# Altium PCB HomeLight.PcbDoc
Units mil, origin at the board's own origin, x right, y up, seen from the top; angles counter-clockwise.
Board outline 6963.33 x 4724.41 mil, 2 copper layers (Top Layer, Bottom Layer); 86 components, 101 nets, 297 pads, 63 vias.
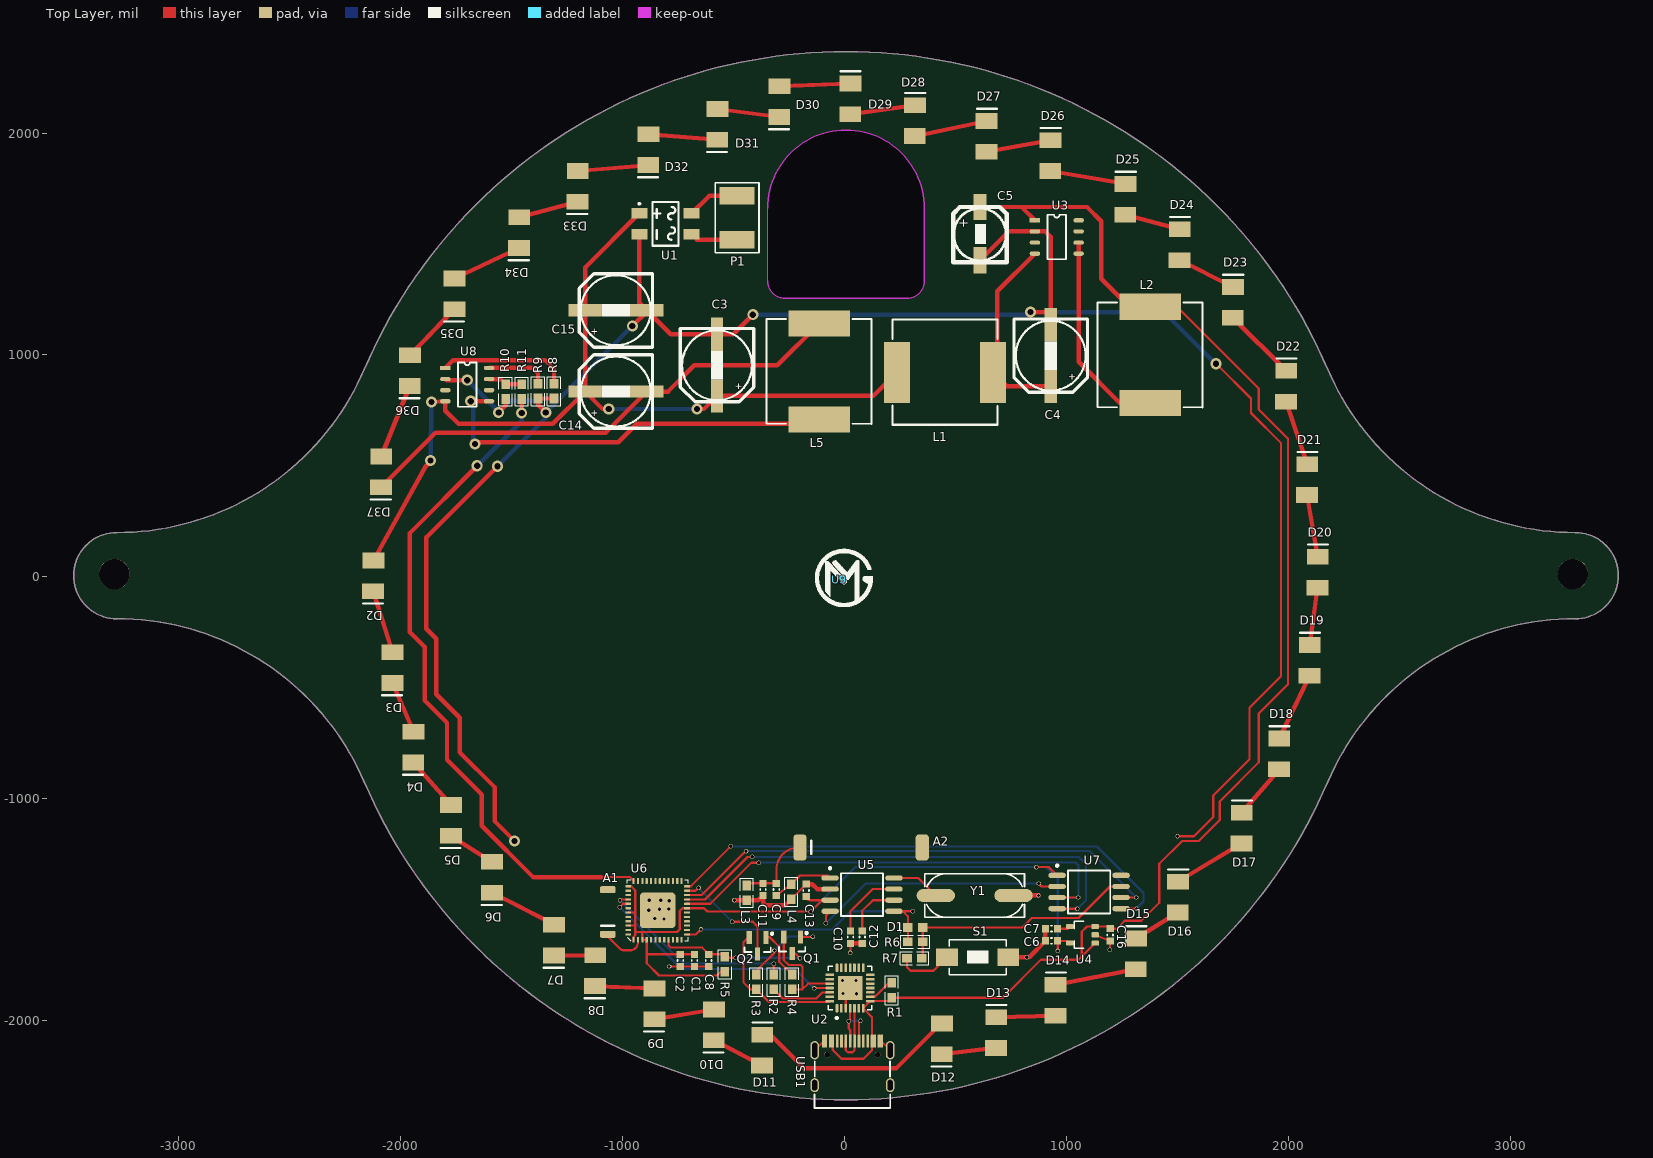
[diagram p0: Top Layer view]
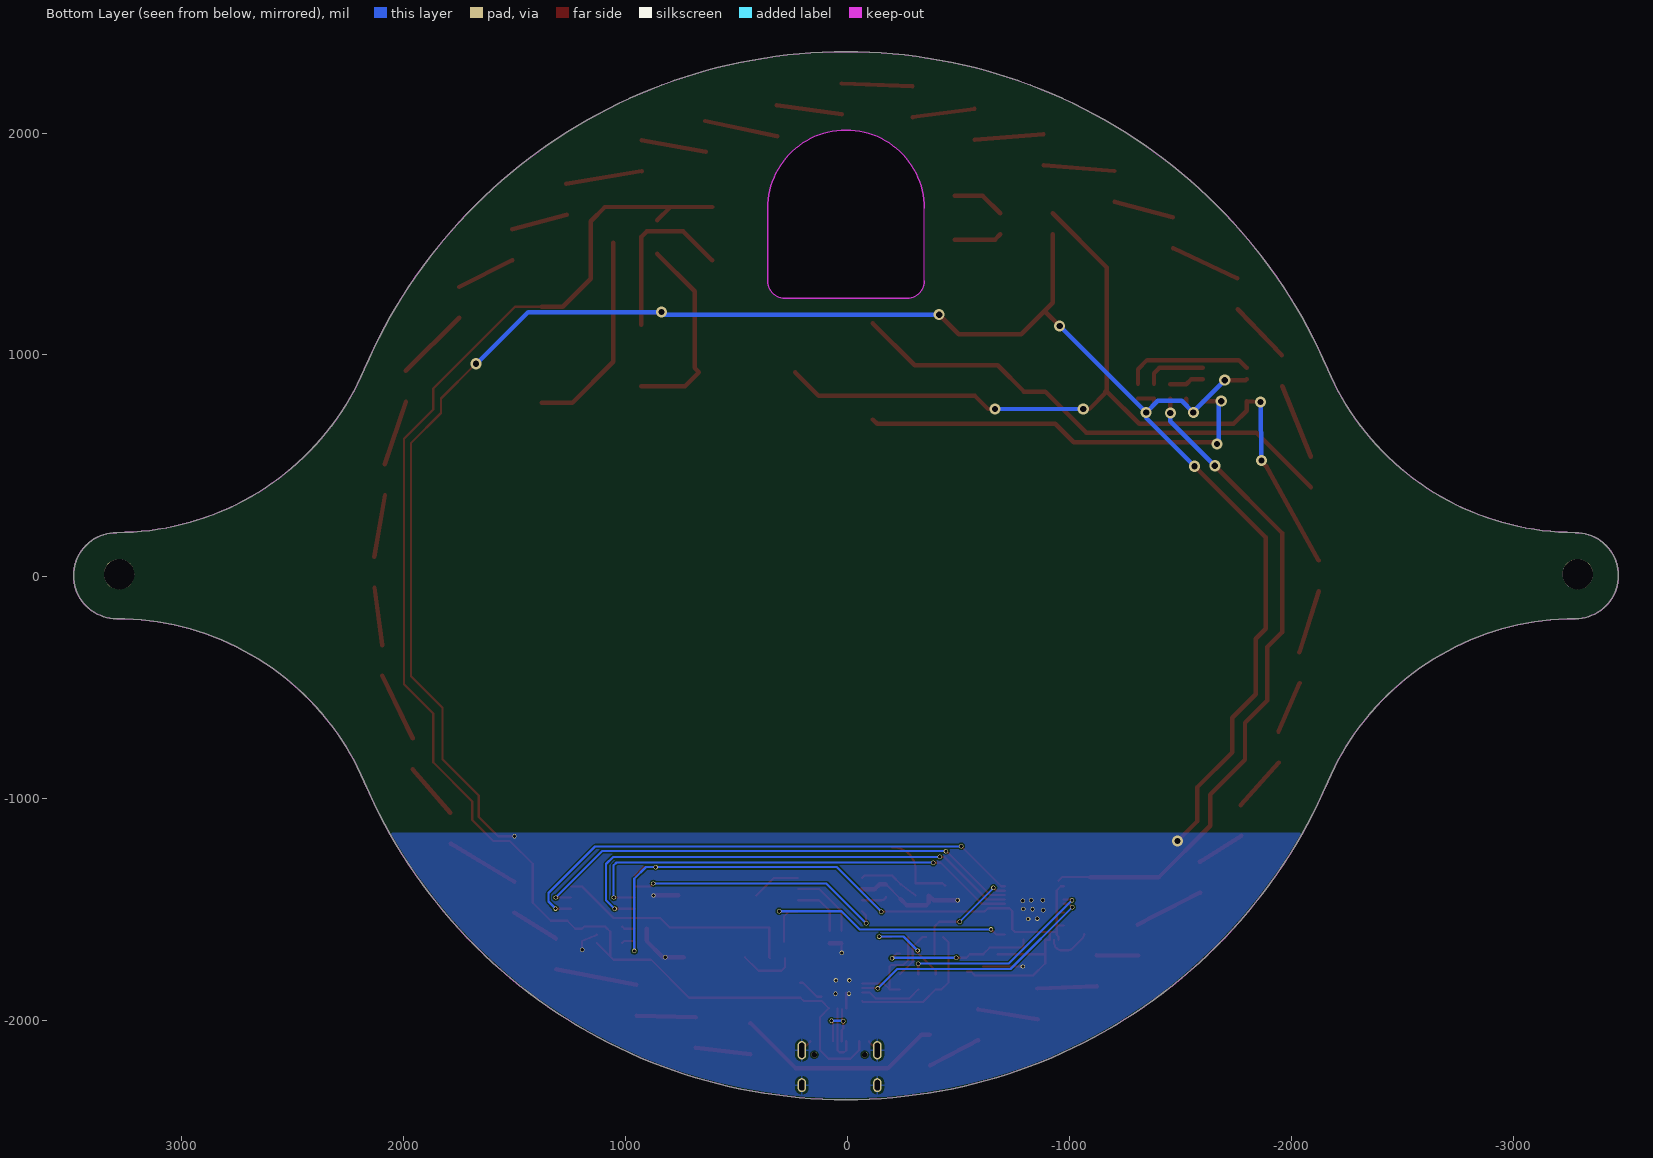
[diagram p1: Bottom Layer view, seen from below]

## Layer stack, top to bottom
Top Solder: solder mask 0.4, Solder Resist, Dk 3.5
Top Layer: signal copper 1.4
Dielectric 1: dielectric 12.6, FR-4, Dk 4.8
Bottom Layer: signal copper 1.4
Bottom Solder: solder mask 0.4, Solder Resist, Dk 3.5

## Board outline
-3280.81,-189.53 cw(c-3280.81,4.73) -3280.81,198.99 ccw(c-3280.81,1413.21) -2164.71,935.02 cw(c6.6,4.73) 2177.9,935.02 ccw(c3294,1413.21) 3294,198.99 cw(c3294,4.73) 3294,-189.53 ccw(c3294,-1403.75) 2177.9,-925.56 cw(c6.6,4.73) -2164.71,-925.56 ccw(c-3280.81,-1403.75)
cut-out: -268.01,1254.55 cw(c-268.01,1333.29) -346.75,1333.29 -346.75,1660.1 cw(c6.6,1660.1) 359.94,1660.1 359.94,1333.29 cw(c281.2,1333.29) 281.2,1254.55

## Design rules (kind name [scope] priority, off if disabled: settings)
Clearance [All] p1: gap=6
MinimumSolderMaskSliver [All] p1: minsoldermaskwidth=4
PolygonConnect [All] p1: connectstyle=Relief reliefconductorwidth=10 reliefentries=4 polygonreliefangle="90 Angle" airgapwidth=10
RoutingVias [All] p1: holewidth=15 width=20 viastyle="Through Hole" minholewidth=10 minwidth=16 maxholewidth=28 maxwidth=50
SilkToSolderMaskClearance [IsPad] p1: minsilkscreentomaskgap=0 clearancetoexposedcopper=TRUE
SolderMaskExpansion [All] p1: expansion=4
Width [All] p1: maxlimit=100 minlimit=4 preferedwidth=10
27 further rules are at their usual default settings.

## Components (designator, comment, footprint, x,y, rotation, side; value= is the part's Value field where it differs from the comment)
A1 "ANT" ANT5020R2400 -1066.93,-1511.81 r90 top
A2 "ANT" ANT15030R433 -200.79,-1220.47 r0 top
C1 "10uF" 0603-2 -676.34,-1729.47 r90 top
C2 "0.1uF" 0603-2 -740.16,-1729.47 r90 top
C3 "Cap Pol" SMD-EC-F8 -574.8,814.96 r90 top
C4 "Cap Pol" SMD-EC-F8 929.13,858.27 r90 top
C5 "Cap Pol" SMD-EC-F6 610.24,1716.54 r270 top
C6 "10uF" 0603-2 933.07,-1641.73 r0 top
C7 "10nF" 0603-2 933.07,-1586.61 r0 top
C8 "1uF" 0603-2 -612.52,-1729.47 r270 top
C9 "Cap" 0603-2 -307.09,-1409.45 r270 top
C10 "Cap" 0603-2 27,-1625 r90 top
C11 "Cap" 0603-2 -367.38,-1409.41 r270 top
C12 "Cap" 0603-2 80,-1625 r90 top
C13 "Cap" 0603-2 -173.23,-1413.39 r90 top
C14 "Cap Pol" SMD-EC-F8 -1169.29,834.65 r0 top
C15 "Cap Pol" SMD-EC-F8 -1169.29,1200.79 r0 top
C16 "Cap" 0603-2 1196.85,-1614.17 r270 top
D1 "LED0" LED_0603 319,-1581 r180 top
D2 "LED0" LED-3528 -2125.98,3.94 r270 top
D3 "LED0" LED-3528 -2039.37,-409.45 r270 top
D4 "LED0" LED-3528 -1944.88,-767.72 r270 top
D5 "LED0" LED-3528 -1775.59,-1098.43 r270 top
D6 "LED0" LED-3528 -1590.55,-1354.33 r270 top
D7 "LED0" LED-3528 -1311.02,-1637.8 r270 top
D8 "LED0" LED-3528 -1125.98,-1775.59 r270 top
D9 "LED0" LED-3528 -858.27,-1925.2 r270 top
D10 "LED0" LED-3528 -590.55,-2019.68 r270 top
D11 "LED0" LED-3528 -370.08,-2133.86 r90 top
D12 "LED0" LED-3528 437.01,-2082.68 r270 top
D13 "LED0" LED-3528 685.04,-2055.12 r90 top
D14 "LED0" LED-3528 952.76,-1909.45 r90 top
D15 "LED0" LED-3528 1314.96,-1700.79 r90 top
D16 "LED0" LED-3528 1503.94,-1444.88 r90 top
D17 "LED0" LED-3528 1791.34,-1133.86 r90 top
D18 "LED0" LED-3528 1960.63,-799.21 r90 top
D19 "LED0" LED-3528 2098.43,-377.95 r90 top
D20 "LED0" LED-3528 2133.86,19.69 r90 top
D21 "LED0" LED-3528 2086.61,437.01 r90 top
D22 "LED0" LED-3528 1992.13,858.27 r90 top
D23 "LED0" LED-3528 1751.97,1236.22 r90 top
D24 "LED0" LED-3528 1511.81,1496.06 r90 top
D25 "LED0" LED-3528 1267.72,1700.79 r90 top
D26 "LED0" LED-3528 929.13,1897.64 r90 top
D27 "LED0" LED-3528 641.73,1984.25 r90 top
D28 "LED0" LED-3528 318.9,2055.12 r90 top
D29 "LED0" LED-3528 27.56,2153.54 r90 top
D30 "LED0" LED-3528 -295.28,2141.73 r270 top
D31 "LED0" LED-3528 -574.8,2039.37 r270 top
D32 "LED0" LED-3528 -885.83,1925.2 r270 top
D33 "LED0" LED-3528 -1204.72,1759.84 r270 top
D34 "LED0" LED-3528 -1468.5,1551.18 r270 top
D35 "LED0" LED-3528 -1759.84,1275.59 r270 top
D36 "LED0" LED-3528 -1960.63,929.13 r270 top
D37 "LED0" LED-3528 -2090.55,472.44 r270 top
L1 "Inductor" L12x12 452.76,921.26 r0 top
L2 "Inductor" L12x12 1377.95,1000 r90 top
L3 "Inductor" 0603-1 -440.94,-1425.2 r90 top
L4 "Inductor" 0603-1 -240,-1420 r90 top
L5 "Inductor" L12x12 -114.17,925.2 r90 top
P1 "Header 2" HDR2X1_焊接版 -484.25,1716.54 r270 top
Q1 "S8050" SOT-23 -236.22,-1661.42 r270 top
Q2 "S8050" SOT-23 -392,-1664 r270 top
R1 "10K" 0603-1 212.6,-1864.17 r90 top
R2 "200R" 0603-1 -318.9,-1826.77 r270 top
R3 "12K" 0603-1 -397.64,-1826.77 r90 top
R4 "12K" 0603-1 -236.22,-1826.77 r90 top
R5 "10K" 0603-1 -539.37,-1747.23 r90 top
R6 "Res1" 0603-1 319.09,-1645.49 r180 top
R7 "Res1" 0603-1 315.16,-1720.29 r0 top
R8 "Res1" 0603-1 -1309.71,836.61 r90 top
R9 "Res1" 0603-1 -1381.89,836.61 r90 top
R10 "Res1" 0603-1 -1527.56,834.65 r90 top
R11 "Res1" 0603-1 -1455.38,834.65 r270 top
S1 "SW-PB" SW_PB2_A1 598,-1715 r270 top
U1 "MBXS" MBXS -925.2,1637.8 r0 top
U2 "CP2102" QFN-28 25,-1854 r90 top
U3 "BP85226" BP85226-BP2881 858.27,1606.3 r0 top
U4 "ME6211C33" SOT23-5 1070.87,-1614.17 r180 top
U5 "RF211A" SOIC-8 78.74,-1433.07 r0 top
U6 "ESP32_SIP" QFN-48_7X7 -842.52,-1503.94 r90 top
U7 "RF211A_MCU01" SOIC-8 1102.36,-1421.26 r0 top
U8 "BP2881X" BP85226-BP2881 -1799.21,940.94 r0 top
U9 "logo_MXJ" logo_MXJ -23,-14 r0 top
USB1 "Type-C" Type-C-TOP 35.43,-2192.91 r270 top
Y1 "XTAL" X-SM49 586.61,-1437.01 r180 top

## Footprints (in the part's own frame and the unit in brackets; to place one, negate y for a bottom-side part, rotate by r counter-clockwise, add the part's x,y. Pads: shape width x height; smd on the part's side, far side on the other; paste and mask are expansions set on the pad)
0603-1 [mm] "贴片带丝印"
  rect 1.1x1 smd: 1(-0.85,0) 2(0.85,0)
  silkscreen extent -1.65,-0.76 1.65,0.76, body extent -1.14,-0.38 1.14,0.38, height 1
0603-2 [mm] "贴片无丝印"
  rect 0.8x0.85 smd: 1(-0.7,0) 2(0.7,0)
  silkscreen extent -0.07,-0.33 0.07,0.33, body extent -0.87,-0.47 0.87,0.47, height 0.85
ANT5020R2400 [mm] "5x2mm,2.4G陶瓷天线"
  rrect50% 0.8x1.8 smd: 1(-2.54,0) ""(2.563,0)
  silkscreen extent -1.57,-0.76 -1.57,0.79, body extent -2.57,-0.91 2.54,0.94, height 1.32
ANT15030R433 [mm] "15x3mm,433M陶瓷天线"
  rrect50% 1.5x3 smd: 1(0,0) ""(14,0)
  silkscreen extent 1.3,-0.75 1.3,0.8
BP85226-BP2881 [mm]
  rect 1.2x0.5 smd: 1(0,0)
  oval 1.2x0.5 smd: 2(0,-1.27) 3(0,-2.54) 4(0,-3.81) 5(5,-3.81) 6(5,-2.54) 7(5,-1.27) 8(5,0)
  silkscreen extent 1.43,-4.44 3.57,0.64
HDR2X1_焊接版 [mm] "用于焊接裸露导线"
  rect 2x4 smd: 1(0,0) 2(5,0)
  silkscreen extent -1.5,-2.5 6.5,2.5
L12x12 [mm]
  rect 3x7 smd: 1(-5.5,0) 2(5.5,0)
  silkscreen extent -6,-6 6,6.04
LED-3528 [mm] "贴片二极管"
  rect 1.8x2.5 smd: 1(-1.753,0.052) 2(1.772,0.027)
  silkscreen extent 3.17,-1.14 3.18,1.14
LED_0603 [mm] "带丝印层"
  rect 1.1x1 smd: 1(-0.85,0) 2(0.85,0)
  silkscreen extent 1.65,-0.56 1.65,0.53, body extent -1.14,-0.38 1.14,0.38, height 1
logo_MXJ [mil] "直径16mm"
  silkscreen extent -109,-120 151,139
MBXS [mm] "整流桥MB1S-MB10S"
  rect 1.84x1.2 smd: 1(0,0) 2(0,-2.4) 3(6,-2.4) 4(6,0)
  silkscreen extent -0.1,-3.7 4.5,1.3
QFN-28 [mil]
  rrect50% 38x12 smd mask+5: 1(-91.5,59.06) 2(-91.5,39.37) 3(-91.5,19.68) 4(-91.5,0) 5(-91.5,-19.69) 6(-91.5,-39.37) 7(-91.5,-59.06) 15(91.5,-59.06) 16(91.5,-39.37) 17(91.5,-19.69) 18(91.5,0) 19(91.5,19.68) 20(91.5,39.37) 21(91.5,59.06)
  rrect50% 12x38 smd mask+5: 8(-59.06,-91.5) 9(-39.37,-91.5) 10(-19.68,-91.5) 11(0,-91.5) 12(19.68,-91.5) 13(39.37,-91.5) 14(59.06,-91.5) 22(59.06,91.5) 23(39.37,91.5) 24(19.68,91.5) 25(0,91.5) 26(-19.68,91.5) 27(-39.37,91.5) 28(-59.06,91.5)
  rect 106.3x110.24 smd: 29(0,0)
  silkscreen extent -140,-98 98,98, body extent -98,-98 98,98, height 35
QFN-48_7X7 [mm]
  rrect20% 4.064x4.064 smd: 0(0,0)
  rrect50% 0.675x0.25 smd: 1(-3.363,2.75) 2(-3.363,2.25) 3(-3.363,1.75) 4(-3.363,1.25) 5(-3.363,0.75) 6(-3.363,0.25) 7(-3.363,-0.25) 8(-3.363,-0.75) 9(-3.363,-1.25) 10(-3.363,-1.75) 11(-3.363,-2.25) 12(-3.363,-2.75) 25(3.363,-2.75) 26(3.363,-2.25) 27(3.363,-1.75) 28(3.363,-1.25) 29(3.363,-0.75) 30(3.363,-0.25) 31(3.363,0.25) 32(3.363,0.75) 33(3.363,1.25) 34(3.363,1.75) 35(3.363,2.25) 36(3.363,2.75)
  rrect50% 0.25x0.675 smd: 13(-2.75,-3.363) 14(-2.25,-3.363) 15(-1.75,-3.363) 16(-1.25,-3.363) 17(-0.75,-3.363) 18(-0.25,-3.363) 19(0.25,-3.363) 20(0.75,-3.363) 21(1.25,-3.363) 22(1.75,-3.363) 23(2.25,-3.363) 24(2.75,-3.363) 37(2.75,3.363) 38(2.25,3.363) 39(1.75,3.363) 40(1.25,3.363) 41(0.75,3.363) 42(0.25,3.363) 43(-0.25,3.363) 44(-0.75,3.363) 45(-1.25,3.363) 46(-1.75,3.363) 47(-2.25,3.363) 48(-2.75,3.363)
  silkscreen extent -3.5,-3.5 3.5,3.5, body extent -3.5,-3.5 3.5,3.5, height 1
SMD-EC-F6 [mm] "直径6.3的贴片电解电容"
  rect 3x1.5 smd: 1(1.27,0) 2(7.366,0)
  silkscreen extent 1.27,-3.05 7.62,3.05
SMD-EC-F8 [mm]
  rect 3.8x1.4 smd: 1(0,0) 2(7.051,0)
  silkscreen extent -0.69,-4.22 7.71,4.2
SOIC-8 [mm]
  oval 2x0.6 smd: 1(-3.658,1.905) 2(-3.658,0.635) 3(-3.658,-0.635) 4(-3.658,-1.905) 5(3.658,-1.905) 6(3.658,-0.635) 7(3.658,0.635) 8(3.658,1.905)
  silkscreen extent -3.78,-2.45 2.41,3.15
SOT23-5 [mm] "SOT23, 3-Leads, Body 3.1x3.0mm (max), Pitch 0.95mm, IPC Medium Density"
  rrect50% 0.889x0.6 smd: 1(-1.5,0.95) 2(-1.5,0) 3(-1.5,-0.95) 4(1.396,-0.95) 5(1.396,0.95)
  silkscreen extent -0.2,-1.55 0.9,1.55, body extent -1.48,-1.45 1.32,1.45, height 1.2
SOT-23 [mm]
  rect 1.5x0.6 smd: 1(-0.95,0.95) 2(-0.95,-0.95) 3(0.95,0)
  silkscreen extent -1.52,-1.5 0.7,1.78, body extent -1.16,-1.45 1.21,1.45, height 1
SW_PB2_A1 [mm] "实验室常用复位开关，白色"
  rect 2x2.5 smd: 1(0,3.556) 2(0,-3.444)
  silkscreen extent -2,-3.19 2,3.31, body extent -2.03,-3.18 2.03,3.3, height 1.2
Type-C-TOP [mm]
  round 0.65 hole 0.65: 0(-0.98,2.89) 0(-0.98,-2.89)
  oval 1.6x1 hole 0.6 slot 1.2 at 0 deg: 1(2.52,4.325) 2(2.52,-4.325)
  oval 2.1x1 hole 0.6 slot 1.7 at 0 deg: 3(-1.48,-4.325) 4(-1.48,4.325)
  rrect50% 1.5x0.3 smd: A1(-2.52,-3.35) A4(-2.52,-2.55) A5(-2.52,-1.25) A6(-2.52,-0.25) A7(-2.52,0.25) A8(-2.52,1.25) A9(-2.52,2.55) A12(-2.52,3.35) B1(-2.52,3.05) B4(-2.52,2.25) B5(-2.52,1.75) B6(-2.52,0.75) B7(-2.52,-0.75) B8(-2.52,-1.75) B9(-2.52,-2.25) B12(-2.52,-3.05)
  silkscreen extent -0.22,-4.33 5.12,4.33, body extent -2.57,-4.48 5.18,4.48, height 3.26
X-SM49 [mm] "贴片晶振"
  oval 4.4x1.5 smd: 1(4.45,0.004) 2(-4.45,-0.004)
  silkscreen extent -5.7,-2.5 5.72,2.5

## Part data
C1 C2 C6 C7 C8: library part Cap, "无极性电容"
C3 C4 C5 C14 C15: "极性电解电容"
C9 C10 C11 C12 C13 C16: "无极性电容"
D1 D2 D3 D4 D5 D6 D7 D8 D9 D10 D11 D12 D13 D14 D15 D16 D17 D18 D19 D20 D21 D22 D23 D24 D25 D26 D27 D28 D29 D30 D31 D32 D33 D34 D35 D36 D37: "发光二极管"
L1 L2 L3 L4 L5: "电感"
P1: "接插件"
Q1 Q2: library part Triode-NPN, "NPN三极管"
R1 R2 R3 R4 R5: library part Res1, "贴片电阻"
R6 R7 R8 R9 R10 R11: "贴片电阻"
S1: "微动开关"
U1: "整流桥"
U2: "USBתTTL"
U3: "开关电源驱动芯片"
U4: library part LP2992, "LDO"
U5: "315M无线接收芯片"
U6: library part ESP32-PICO
U7: "无线接收芯片的解码芯片"
U8: "PWM调光非隔离降压型LED恒流驱动芯片"
USB1: library part USB-Type-C-TOP
Y1: "晶振"

## Free pads (board coordinates)
  round 137.8 hole 137.8: 1(-3291.34,11.81) 2(3283.46,11.81)

## Via types
v1: diameter 20, hole 15, Top Layer to Bottom Layer, 46 vias
v2: diameter 50, hole 28, Top Layer to Bottom Layer, 17 vias

## Nets (pads, with @x,y where several pads share a name; then routed paths per layer and width w, separated by ;. In a path a pad name is that pad's centre, name@x,y a point inside that pad or via, vN(x,y) a via of type N, cw(c..) or ccw(c..) an arc to the next point about the centre after c; other vN are vias at no path point)
3V3: C1.2 C2.2 C6.2 C13.1 R5.1 U4.5 U5.3 U6.1 U6.3 U6.4 U6.19 U6.37 U6.43 U6.46 U7.1 | length 3927.2
  Top Layer w10: U6.46 -943.17,-1572.83 -943,-1573 ; U6.43 -943.72,-1513.78 -943,-1514.5 ; U6.37 -961.33,-1395.67 -943,-1414 -943,-1514.5 ; U6.1 -950.79,-1622.79 -943,-1615 -943,-1602 ; C1.2 C2.2 -891.65,-1701.91 -891.73,-1702 ; R5.1 -557.69,-1780.69 -575,-1798 -836,-1798 -891.73,-1742.27 -891.73,-1702 ; C13.1 ccw(c-156.1,-1440.94) -156.1,-1458.07 U5.3@-101.07,-1458.07 ; U5.3 U5.3@-101.07,-1458.07 ; v1(865,-1309) 921.1,-1309 U7.1 ; v1(961,-1687) 960.63,-1686.63 C6.2 1006.08,-1641.73 U4.5 ; -943,-1602 -943,-1573 ; -943,-1602 -914,-1602 ; -943,-1573 -943,-1514.5 ; -914,-1602 -911.42,-1604.58 U6.3 U6.4 -891.73,-1702 ; -914,-1602 -755,-1602 -743,-1590 -743,-1507 -730.09,-1494.09 U6.19 -633.09,-1494.09 -618,-1509.19 -153.81,-1509.19 v1(-153,-1510) U5.3@-101.07,-1458.07
  Bottom Layer w10: v1(-153,-1510) 48,-1309 v1(865,-1309) 908,-1309 961,-1362 v1(961,-1687)
300V: C3.1 C14.1 C15.1 D2.1 L1.1 U1.1 U8.4 | length 4026.2
  Top Layer w20: D2.1 -1885.83,500 v2(-1866.14,523.62) ; v2(-1862.2,787.4) U8.4 -1799.21,748.03 -1740.16,688.98 -1314.96,688.98 C14.1 ; C14.1@-1161.42,834.65 C14.1@-1169.29,842.52 ; v2(-1062.99,755.91) -1090.55,755.91 C14.1 ; U1.1 -1169.29,1393.7 C15.1 C14.1@-1169.29,842.52 ; v2(-665.35,755.91) -633.86,755.91 C3.1 129.92,814.96 L1.1 ; C14.1 C14.1@-1169.29,842.52
  Bottom Layer w20: v2(-1866.14,523.62) v2(-1862.2,787.4) ; v2(-1062.99,755.91) v2(-665.35,755.91)
CP_RX: U2.25 U6.41 | length 1143.5
  Top Layer w10: v1(-1013,-1490) -997.41,-1474.41 U6.41 ; v1(-137,-1856) -135,-1854 U2.25
  Bottom Layer w10: v1(-1013,-1490) -735,-1768 -225,-1768 v1(-137,-1856)
CP_TX: R2.1 U6.40 | length 899.3
  Top Layer w10: v1(-1012,-1459) -1007.72,-1454.72 U6.40 ; v1(-319,-1744) -318.9,-1744.1 R2.1
  Bottom Layer w10: v1(-1012,-1459) -727,-1744 v1(-319,-1744)
DTR: Q2.2 R3.1 U2.28 | length 642.3
  Top Layer w10: Q2.2@-431.1,-1624.02 -456,-1648.91 -456,-1828 -423.76,-1860.24 R3.1 -340.87,-1917 -70.44,-1917 U2.28
EN: C8.1 Q1.3 R5.2 U6.9 | length 686.7
  Top Layer w10: U6.9 -793.31,-1661.69 -783,-1672 -641,-1672 -612.52,-1700.48 C8.1 -551.22,-1701.91 R5.2 -535.13,-1718 v1(-491,-1718) ; Q1.3 -222.18,-1698.82 v1(-201,-1720)
  Bottom Layer w10: v1(-491,-1718) -203,-1718 v1(-201,-1720)
FLASH_CLK: U6.31
FLASH_CS: U6.25
FLASH_SD0: U6.27
FLASH_SD1: U6.33
FLASH_SD2: U6.30
FLASH_SD3: U6.32
GND: C1.1 C2.1 C3.2 C4.2 C5.2 C6.1 C7.1 C8.2 C10.1 C11.2 C12.1 C13.2 C15.2 C16.2 L3.1 L4.1 R8.1 R9.1 R10.1 S1.1 U1.2 U2.3 U2.29 U3.2 U4.2 U5.2 U6.0 U8.2 USB1.1 USB1.2 USB1.3 USB1.4 USB1.A1 USB1.A12 USB1.B1 USB1.B12 Y1.2 | length 11656.9
  Top Layer w10: v1(-790.97,-1757.03) C2.1 C1.1 C8.2 ; L4.1 -173.23,-1386.69 C13.2 ; USB1.3 -96.46,-2096.26 USB1.A1 ; U2.3 U2.29@5.32,-1873.68 ; v1(26,-1696) 27,-1695 C10.1 ; USB1.A12 167.32,-2096.26 USB1.4 ; U4.2 C16.2 1196.85,-1680.15 v1(1196,-1681) ; v1(1501,-1170) 1575,-1170 1662,-1083 1662,-986 1826,-822 1826,-590 1968,-448 1968,602 1832,738 1832,803 v2(1675,960)
  Top Layer w20: U8.2 -1794.09,885.83 v2(-1700.79,885.83) ; v2(-1564,498) -1885,177 -1885,-235 -1840,-280 -1840,-530 -1734,-636 -1734,-792 -1576,-950 -1576,-1103 v2(-1488,-1191) ; v2(-1559.06,740.16) -1527.56,771.65 R10.1 ; v2(-1346.46,740.16) -1381.89,775.59 R9.1 R8.1 ; v2(-956.69,1129.92) -891.7,1194.91 C15.2 ; U1.2 -925.2,1234.28 C15.2 ; v1(-496.34,-1458.66) L3.1 -389.07,-1458.66 C11.2 -367.38,-1468.62 -356,-1480 -266.54,-1480 L4.1 ; v2(-413.39,1181.1) -501.94,1092.55 C3.2 -783.46,1092.55 C15.2 ; C13.2 -145.17,-1385.83 -122.93,-1408.07 U5.2 ; C10.1 C12.1 ; C5.2 740,1556.3 U3.2 904.33,1556.3 929.13,1531.5 C4.2 ; S1.1 v1(821,-1715) ; Y1.2 874.16,-1436.84 v1(874.32,-1437) ; 832.24,-1715 C6.1 C7.1 ; v2(838.58,1192.91) C4.2@913.39,1192.91
  Bottom Layer w20: v2(-1700.79,885.83) -1559.06,744.09 v2(-1559.06,740.16) -1506.21,793 -1399.3,793 v2(-1346.46,740.16) ; v2(-1564,498) -1346.46,715.54 v2(-1346.46,740.16) ; v2(-956.69,1129.92) v2(-1346.46,740.16) ; v2(-413.39,1181.1) 826.77,1181.1 v2(838.58,1192.91) 1439.09,1192.91 1675,957 v2(1675,960)
  other v1: 54,-1880 -7,-1879 -9,-1820 52,-1820 -814,-1543 -856,-1541 -882,-1503 -834,-1499 -793,-1498 -790,-1460 -880,-1459 -829,-1459
GPIO0: Q2.3 U6.23 | length 512.9
  Top Layer w10: U6.23 -671.35,-1415.35 v1(-658,-1402) ; v1(-506,-1555) -414,-1555 -392,-1577 Q2.3
  Bottom Layer w10: v1@-658,-1403 v1(-658,-1402) ; v1@-652.15,-1408.85 v1(-506,-1555)
GPIO2: U6.22 U7.6 | length 2265.7
  Top Layer w10: U6.22 -644.04,-1435.04 -444,-1235 v1(-444,-1237) ; U7.6 1314.74,-1446.26 v1(1315,-1446)
  Bottom Layer w10: v1@-444,-1236 1105,-1236 v1(1315,-1446)
GPIO4: U6.24 U7.5 | length 2373
  Top Layer w10: U6.24 -693.67,-1395.67 v1(-513,-1215) ; U7.5 1315.74,-1496.26 v1(1316,-1496)
  Bottom Layer w10: v1@-513,-1216 1138,-1216 1348,-1426 1348,-1464 v1(1316,-1496)
GPIO5: U6.34
GPIO9: U6.28
GPIO10: U6.29
GPIO12: U6.18
GPIO13: U6.20 U7.3 | length 2087.1
  Top Layer w10: U6.20 -605.41,-1474.41 -420,-1289 v1(-387,-1289) ; U7.3 1053.74,-1446.26 v1(1054,-1446)
  Bottom Layer w10: v1@-387,-1288 1041,-1288 1054,-1301 v1(1054,-1446)
GPIO14: U6.17
GPIO15: U6.21 U7.4 | length 2199.3
  Top Layer w10: U6.21 -628.72,-1454.72 -437,-1263 v1(-416,-1263) ; U7.4 v1(1049.74,-1496.26)
  Bottom Layer w10: v1(-416,-1263) 1056,-1263 1088,-1295 1088,-1458 v1(1049.74,-1496.26)
GPIO18: U6.35
GPIO19: U6.38
GPIO21: U6.42
GPIO22: U6.39
GPIO23: R11.2 U6.36 | length 3054.2
  Top Layer w10: -1095,-1354 -968.34,-1354 U6.36
  Top Layer w20: v2(-1656,500) -1959,197 -1959,-250 -1892,-317 -1892,-558 -1792,-658 -1792,-825 -1635,-982 -1635,-1123 -1404,-1354 -1095,-1354 ; v2(-1455.38,737.38) R11.2
  Bottom Layer w20: v2(-1656,500) -1455.38,700.62 v2(-1455.38,737.38)
GPIO25: U6.14
GPIO26: U6.15
GPIO27: U6.16
GPIO32: U6.12
GPIO33: D1.2 R6.2 U5.5 U6.13 | length 1293.2
  Top Layer w10: U6.13 -669.2,-1612.2 v1(-647,-1590) ; U5.5 263.07,-1508.07 ; R6.2 285.54,-1645.39 D1.2 285.54,-1530.54 263.07,-1508.07 ; v1(307.93,-1508.07) 263.07,-1508.07
  Bottom Layer w10: v1(-647,-1590) -55,-1590 26.93,-1508.07 v1(307.93,-1508.07)
GPIO34: U6.10
GPIO35: U6.11
GPIO37: U6.6
GPIO38: U6.7
NetA1_1: A1.1 U6.2 | length 202
  Top Layer w10: A1.1 ccw(c-1042.16,-1611.81) -1059.68,-1629.32 ; -1059.67,-1629.33 -1012,-1677 ccw(c-995.1,-1660.1) -995.1,-1684 -966.14,-1684 ccw(c-966.14,-1649.86) -942,-1674 ccw(c-968.31,-1647.69) -931.1,-1647.69 U6.2
NetA2_1: A2.1 C9.1 C11.1 L3.2 | length 362.7
  Top Layer w10: L3.2 -438.73,-1391.73 -428.85,-1381.85 C11.1 -307.13,-1381.85 -307.13,-1320.47 cw(c-207.13,-1320.47) -207.13,-1220.47 A2.1
NetC4_1: C4.1 L1.2 U3.4 | length 899.2
  Top Layer w20: U3.4 688.98,1287.01 688.98,940.94 L1.2 732.28,858.27 C4.1
NetC7_2: C7.2 U4.4 | length 59.4
  Top Layer w10: C7.2 1006.08,-1586.61 U4.4
NetC9_2: C9.2 L4.2 U5.1 | length 279.7
  Top Layer w10: C9.2 L4.2 -200.46,-1347 -76.33,-1347 U5.1
NetC10_2: C10.2 U5.7 | length 326.6
  Top Layer w10: C10.2 27,-1508 126.93,-1408.07 U5.7
NetC12_2: C12.2 U5.6 | length 254
  Top Layer w10: C12.2 80,-1506 127.93,-1458.07 U5.6
NetD1_1: D1.1 R6.1 R7.2 U7.7 | length 1111.3
  Top Layer w10: R7.2 352.46,-1716.45 D1.1 801,-1581 844,-1538 1055,-1538 1196.74,-1396.26 U7.7
NetD2_2: D2.2 D3.1 | length 288.2
  Top Layer w20: D2.2 D3.1
NetD3_2: D3.2 D4.1 | length 239.4
  Top Layer w20: D3.2 D4.1
NetD4_2: D4.2 D5.1 | length 256.6
  Top Layer w20: D4.2 D5.1
NetD5_2: D5.2 D6.1 | length 219.8
  Top Layer w20: D5.2 D6.1
NetD6_2: D6.2 D7.1 | length 315.6
  Top Layer w20: D6.2 D7.1
NetD7_2: D7.2 D8.1 | length 186
  Top Layer w20: D7.2 D8.1
NetD8_2: D8.2 D9.1 | length 268.9
  Top Layer w20: D8.2 D9.1
NetD9_2: D9.2 D10.1 | length 272.3
  Top Layer w20: D9.2 D10.1
NetD10_2: D10.2 D11.1 | length 245.2
  Top Layer w20: D10.2 D11.1
NetD11_2: D11.2 D12.1 | length 957.4
  Top Layer w20: D11.2 -333.54,-2064.09 -181.1,-2216.54 232.28,-2216.54 435.16,-2013.66 D12.1
NetD12_2: D12.2 D13.1 | length 246.6
  Top Layer w20: D12.2 D13.1
NetD13_2: D13.2 D14.1 | length 266.8
  Top Layer w20: D13.2 D14.1
NetD14_2: D14.2 D15.1 | length 367.9
  Top Layer w20: D14.2 D15.1
NetD15_2: D15.2 D16.1 | length 221.5
  Top Layer w20: D15.2 D16.1
NetD16_2: D16.2 D17.1 | length 334.2
  Top Layer w20: D16.2 D17.1
NetD17_2: D17.2 D18.1 | length 258.2
  Top Layer w20: D17.2 D18.1
NetD18_2: D18.2 D19.1 | length 313.9
  Top Layer w20: D18.2 D19.1
NetD19_2: D19.2 D20.1 | length 261.1
  Top Layer w20: D19.2 D20.1
NetD20_2: D20.2 D21.1 | length 282.7
  Top Layer w20: D21.1 D20.2
NetD21_2: D21.2 D22.1 | length 298.2
  Top Layer w20: D22.1 D21.2
NetD22_2: D22.2 D23.1 | length 339.6
  Top Layer w20: D23.1 D22.2
NetD23_2: D23.2 D24.1 | length 269.8
  Top Layer w20: D24.1 D23.2
NetD24_2: D24.2 D25.1 | length 253.8
  Top Layer w20: D25.1 D24.2
NetD25_2: D25.2 D26.1 | length 344.5
  Top Layer w20: D26.1 D25.2
NetD26_2: D26.2 D27.1 | length 293.1
  Top Layer w20: D27.1 D26.2
NetD27_2: D27.2 D28.1 | length 330.9
  Top Layer w20: D28.1 D27.2
NetD28_2: D28.2 D29.1 | length 295.1
  Top Layer w20: D29.1 D28.2
NetD29_2: D29.2 D30.1 | length 320
  Top Layer w20: D30.1 D29.2
NetD30_2: D30.2 D31.1 | length 280.9
  Top Layer w20: D31.1 D30.2
NetD31_2: D31.2 D32.1 | length 311
  Top Layer w20: D32.1 D31.2
NetD32_2: D32.2 D33.1 | length 319
  Top Layer w20: D33.1 D32.2
NetD33_2: D33.2 D34.1 | length 271.9
  Top Layer w20: D34.1 D33.2
NetD34_2: D34.2 D35.1 | length 321
  Top Layer w20: D35.1 D34.2
NetD35_2: D35.2 D36.1 | length 288.2
  Top Layer w20: D36.1 D35.2
NetD36_2: D36.2 D37.1 | length 343.1
  Top Layer w20: D37.1 D36.2
NetL2_1: L2.1 U3.5 U3.6 | length 937.3
  Top Layer w20: U3.6 U3.5 1055.12,968.5 1240.16,783.46 L2.1
NetL5_1: L5.1 U8.5 | length 1890.9
  Top Layer w20: v2(-1685.04,791.34) -1602.76,791.34 U8.5 ; v2(-1665.35,598.43) -1665.35,610.24 -1661.42,606.3 -1019.68,606.3 -937.01,688.98 -133.86,688.98 L5.1
  Bottom Layer w20: v2(-1685.04,791.34) -1673.23,779.53 -1673.23,618.11 -1665.35,610.24 v2(-1665.35,598.43)
NetP1_1: P1.1 U1.4 | length 237.3
  Top Layer w20: U1.4 -610.24,1716.54 P1.1
NetP1_2: P1.2 U1.3 | length 214.5
  Top Layer w20: U1.3 -665.35,1519.69 P1.2
NetQ1_1: Q1.1 R3.2 | length 397.9
  Top Layer w10: R3.2 -397.64,-1776.64 -316,-1695 v1(-316,-1685) ; Q1.1 -145.02,-1624.02 v1(-143,-1622)
  Bottom Layer w10: v1(-316,-1685) -253,-1622 v1(-143,-1622)
NetQ2_1: Q2.1 R4.2 | length 229.8
  Top Layer w10: Q2.1@-356.3,-1624.02 -337.98,-1624.02 -294,-1668 -294,-1735.53 R4.2
NetR1_2: R1.2 U2.9 | length 122.1
  Top Layer w10: U2.9 137.63,-1893.37 200.29,-1830.71 R1.2
NetR2_2: R2.2 U2.26 | length 280.6
  Top Layer w10: R2.2 -278.13,-1901 -127,-1901 -99.68,-1873.68 U2.26
NetR7_1: R7.1 S1.2 | length 252.7
  Top Layer w10: R7.1 281.69,-1760.69 297,-1776 401.41,-1776 S1.2
NetR8_2: R8.2 U8.1 | length 586.6
  Top Layer w20: U8.1 -1763.78,976.38 -1350.39,976.38 -1309.71,935.7 R8.2
NetR9_2: R9.2 U8.8 | length 277.5
  Top Layer w20: U8.8 -1405.51,940.94 -1381.89,917.32 R9.2
NetU5_4: U5.4 U7.2 | length 1183.7
  Top Layer w10: v1(-84,-1562) -84,-1526.81 U5.4 ; v1(875,-1383) 888.26,-1396.26 U7.2
  Bottom Layer w10: v1(-84,-1562) 95,-1383 v1(875,-1383)
NetU5_8: U5.8 Y1.1 | length 221.4
  Top Layer w10: U5.8 332.31,-1358.07 Y1.1
OUT_LED: C14.2 D37.2 L5.2 | length 2281.4
  Top Layer w20: D37.2 -1842.56,649.61 -1076.74,649.61 C14.2 -795.28,834.65 -677.17,952.76 -303.15,952.76 L5.2
PWM_LED: R10.2 R11.1 U8.7 | length 156.4
  Top Layer w20: U8.7 -1550.39,890.94 R10.2 R11.1
RTS: Q1.2 R4.1 U2.24 | length 482.9
  Top Layer w10: Q1.2 -273.62,-1728.38 -252,-1750 -198,-1750 -190,-1758 -190,-1860.24 ; R4.1 -190,-1860.24 ; U2.24 -164.08,-1834.32 -190,-1860.24
SENSOR_VN: U6.8
SENSOR_VP: U6.5
USB-PWR-DM: U2.5 USB1.A7 USB1.B7 | length 275.1
  Top Layer w10: USB1.B7 5.91,-2134.91 15,-2144 36,-2144 45.28,-2134.72 USB1.A7 U2.5@45.28,-1947.8
USB-PWR-DP: U2.4 USB1.A6 USB1.B6 | length 296.1
  Top Layer w10: U2.4@25,-1948.39 25,-1996 19,-2002 v1(19,-2004) 19,-2037 25.59,-2043.59 USB1.A6 ; USB1.B6 64.96,-2009.04 v1(72,-2002)
  Bottom Layer w10: v1@21,-2002 v1(72,-2002)
VDD_5V: C5.1 C16.1 L2.2 R1.1 U2.7 U2.8 U3.1 U4.1 U4.3 USB1.A4 USB1.A9 USB1.B4 USB1.B9 | length 6635.3
  Top Layer w10: USB1.B9 -53.15,-2133.85 -14,-2173 85,-2173 124.02,-2133.98 USB1.B4 124.02,-1985.46 U2.7 U2.8 197.18,-1913.06 R1.1 714.36,-1897.64 885,-1727 1054.5,-1727 1069.75,-1711.75 ; U4.1 1069.75,-1711.75 ; L2.2 1498.46,1216.54 1867,848 1867,754 1999,622 1999,-485 1867,-617 1867,-837 1691,-1013 1691,-1097 1597,-1191 1522,-1191 1419,-1294 1419,-1470 1338,-1551 1263,-1551 1227.39,-1586.61 C16.1 1187.01,-1576.77 U4.3 1093.23,-1576.77 1069.75,-1600.25 1069.75,-1711.75
  Top Layer w20: C5.1 798.03,1666.54 ; U3.1 798.03,1666.54 ; L2.2 1283.46,1216.54 1157.48,1342.52 1157.48,1602.36 1093.31,1666.54 798.03,1666.54
pads on no net: A1. A2. U2.1 U2.2 U2.6 U2.10 U2.11 U2.12 U2.13 U2.14 U2.15 U2.16 U2.17 U2.18 U2.19 U2.20 U2.21 U2.22 U2.23 U2.27 U3.3 U3.7 U3.8 U6.26 U6.44 U6.45 U6.47 U6.48 U7.8 U8.3 U8.6 USB1.0 USB1.A5 USB1.A8 USB1.B5 USB1.B8

## Polygon pours and split planes (outlines as drawn)
GND on Bottom Layer "GND_B" (solid, remove dead copper, pour order 4): -2169,-1154 2155,-1154 2107,-1202 2107,-1380 2060,-1380 1470,-1970 922,-2518 17,-2518 -1011,-2518 -2094,-1435 -2169,-1360 -2169,-1230

## Keep-outs
Keep-Out Layer:
  circle w0.5: c123923.14,51386.42 r68.9
  circle w0.5: c117348.33,51386.42 r68.9
  circle w1: c129701.57,56775.36 r68.9
  circle w1: c123126.76,56775.36 r68.9
  lines w0.1: -3280.81,-189.53 cw(c-3280.81,-1403.75) -2164.71,-925.56 ccw(c6.6,4.73) 2177.9,-925.56 cw(c3294,-1403.75) 3294,-189.53 ccw(c3294,4.73) 3294,198.99 cw(c3294,1413.21) 2177.9,935.02 ccw(c6.6,4.73) -2164.71,935.02 cw(c-3280.81,1413.21) -3280.81,198.99 ccw(c-3280.81,4.73) -3280.81,-189.53 ; -346.75,1333.29 ccw(c-268.01,1333.29) -268.01,1254.55 281.2,1254.55 ccw(c281.2,1333.29) 359.94,1333.29 359.94,1660.1 ccw(c6.6,1660.1) -346.75,1660.1 -346.75,1333.29
  lines w0.5: 117348.33,51192.16 cw(c117348.33,49977.94) 118464.43,50456.13 ccw(c120635.74,51386.42) 122807.04,50456.13 cw(c123923.14,49977.94) 123923.14,51192.16 ccw(c123923.14,51386.42) 123923.14,51580.68 cw(c123923.14,52794.9) 122807.04,52316.71 ccw(c120635.74,51386.42) 118464.43,52316.71 cw(c117348.33,52794.9) 117348.33,51580.68 ccw(c117348.33,51386.42) 117348.33,51192.16
  lines w1: 123126.76,56581.1 cw(c123126.76,55366.88) 124242.86,55845.07 ccw(c126414.16,56775.36) 128585.47,55845.07 cw(c129701.57,55366.88) 129701.57,56581.1 ccw(c129701.57,56775.36) 129701.57,56969.62 cw(c129701.57,58183.84) 128585.47,57705.65 ccw(c126414.16,56775.36) 124242.86,57705.65 cw(c123126.76,58183.84) 123126.76,56969.62 ccw(c123126.76,56775.36) 123126.76,56581.1

## Silkscreen, mask and mechanical layers (free items; w line width, h text height)
Mechanical 1:
  circle w10: c-3.94,0 r2125.98

## Text inside footprints (layer, text, board x,y; h text height)
C3: Top Overlay "+" at -463.87,840.17 h30 r90
C4: Top Overlay "+" at 1040.06,883.48 h30 r90
C5: Top Overlay "+" at 520.24,1616.54 h39.37 r270
C14: Top Overlay "+" at -1144.08,723.72 h30
C15: Top Overlay "+" at -1144.08,1089.86 h30